# EAGLE board LedExtensionBoard_x12 (EAGLE 9.1.3), part 1 of 2
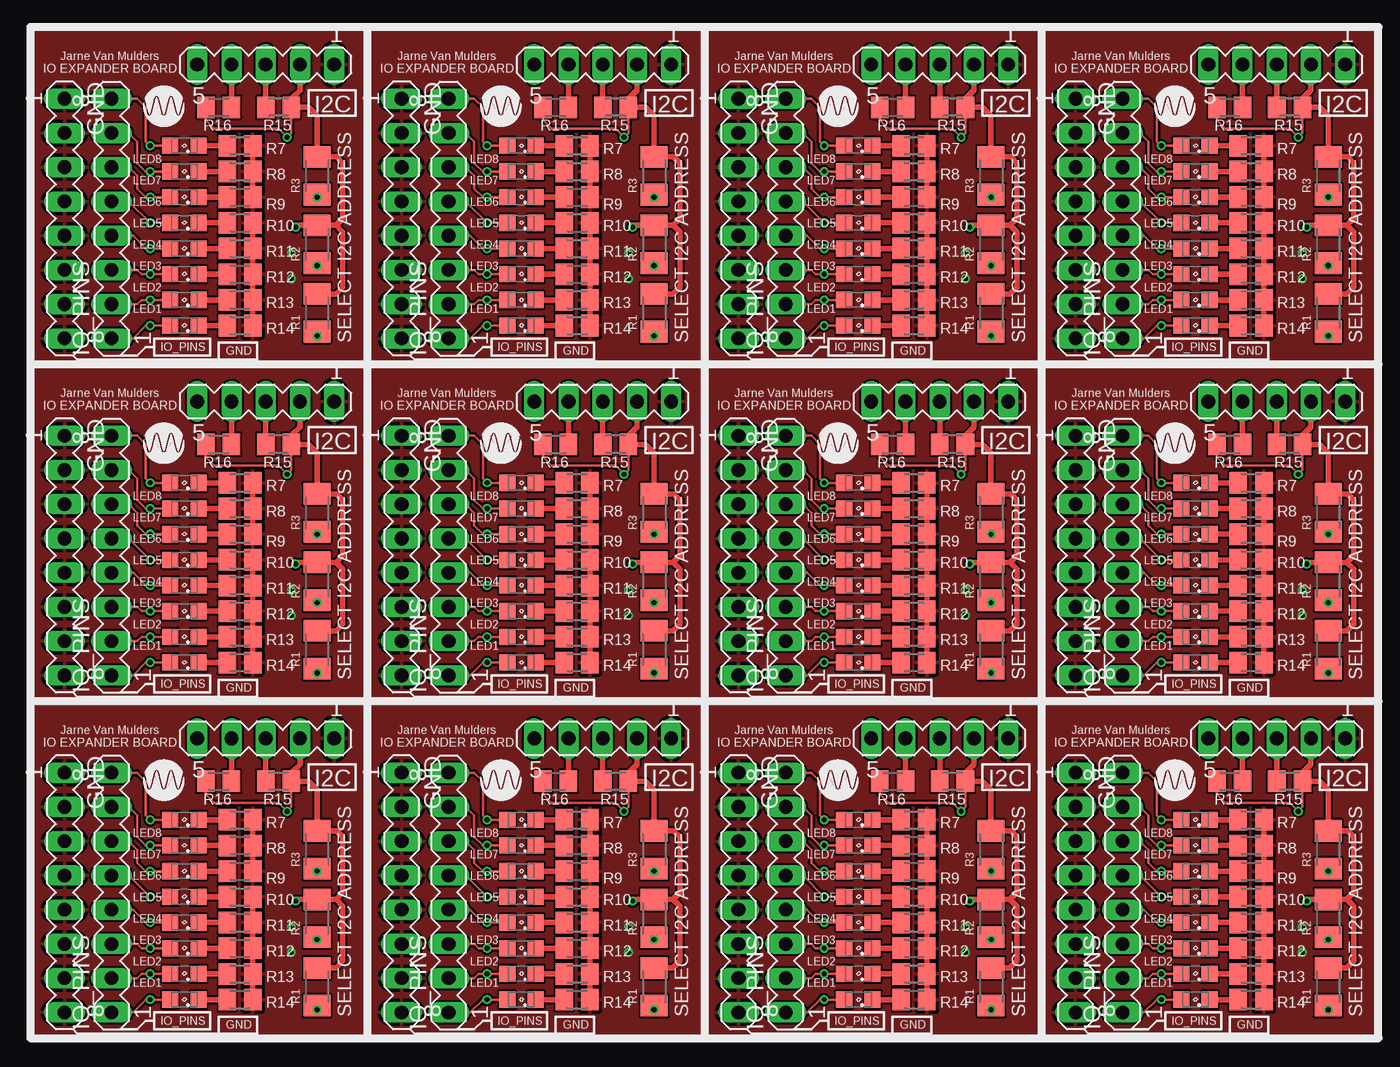
[diagram p0: board, top side]
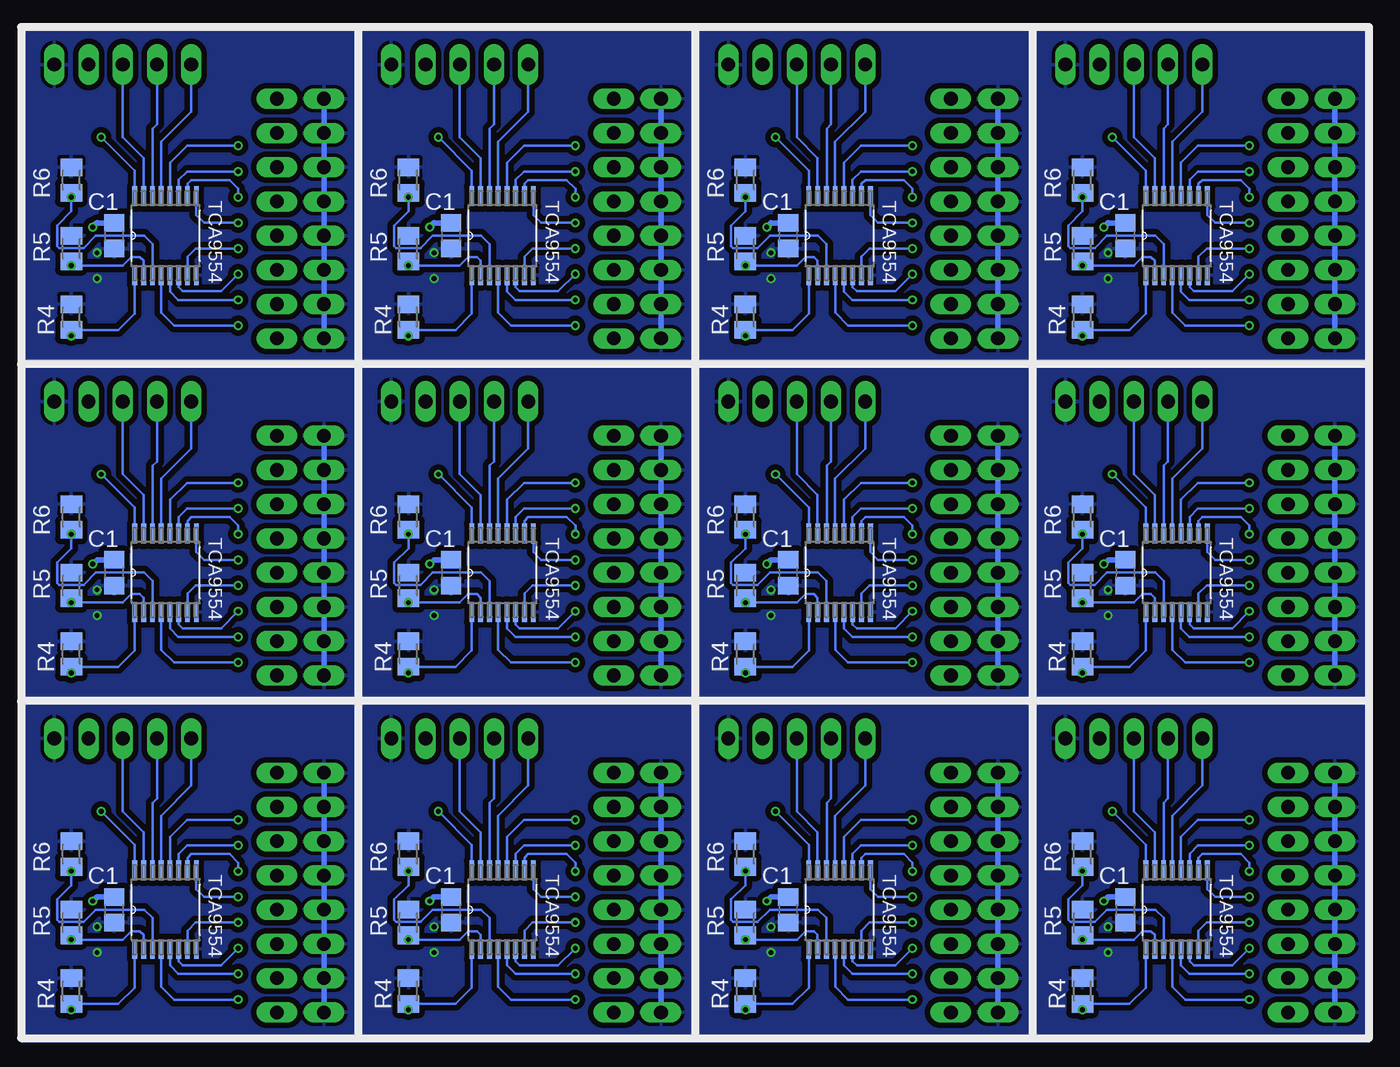
[diagram p1: board, bottom side, seen from below]

No outline drawn. Coordinates in mm, seen from the top.
Copper layers (1*16): Top 0.035mm / dielectric 1.5mm / Bottom 0.035mm
Design rules "SeeedStudio_2layer_DRU_no_angle_20140221-2": minimum track width 6mil, minimum drill 12mil, track to track 6mil, track to pad 6mil, pad to pad 6mil, via to via 6mil, smd to smd 0mil, copper to edge 10mil, drill to drill 10mil, minimum pad ring 10mil, minimum via ring 6mil, stop-mask expansion 2mil, vias tented up to drill 100mil, thermal gap 10mil

## Footprints (pad centres in the part's own frame; a part is rotated, then mirrored left to right if it is on the bottom)
C0805 = smd 1.3 x 1.5: 1 -0.95,0; 2 0.95,0
MA08-1 = drill 1.016 long: 1 -8.89,0; 2 -6.35,0; 3 -3.81,0; 4 -1.27,0; 5 1.27,0; 6 3.81,0; 7 6.35,0; 8 8.89,0
MA05-1 = drill 1.016 long: 1 -5.08,0; 2 -2.54,0; 3 0,0; 4 2.54,0; 5 5.08,0
SML0805 = smd 1.2 x 1.2: A 1.05,0; C -1.05,0
M1206 = smd 1.6 x 2: 1 -1.4,0; 2 1.4,0
M0805 = smd 1.3 x 1.6: 1 -0.95,0; 2 0.95,0
SOP65P640X120-16N = smd 1.473 x 0.356: 1 -2.921,2.286; 2 -2.921,1.626; 3 -2.921,0.965; 4 -2.921,0.33; 5 -2.921,-0.33; 6 -2.921,-0.965; 7 -2.921,-1.626; 8 -2.921,-2.286; 9 2.921,-2.286; 10 2.921,-1.626; 11 2.921,-0.965; 12 2.921,-0.33; 13 2.921,0.33; 14 2.921,0.965; 15 2.921,1.626; 16 2.921,2.286

## Placement (x,y rotation side)
C1  [C0805]  18.1,9.53 270 bottom
C2  [C0805]  43.1,9.53 270 bottom
C3  [C0805]  68.1,9.53 270 bottom
C4  [C0805]  93.1,9.53 270 bottom
C5  [C0805]  18.1,34.52 270 bottom
C6  [C0805]  43.1,34.52 270 bottom
C7  [C0805]  68.1,34.52 270 bottom
C8  [C0805]  93.1,34.52 270 bottom
C9  [C0805]  18.1,59.52 270 bottom
C10  [C0805]  43.1,59.52 270 bottom
C11  [C0805]  68.1,59.52 270 bottom
C12  [C0805]  93.1,59.52 270 bottom
GND  [MA08-1]  2.54,10.79 270 top
GND1  [MA08-1]  27.54,10.79 270 top
GND2  [MA08-1]  52.54,10.79 270 top
GND3  [MA08-1]  77.54,10.79 270 top
GND4  [MA08-1]  2.54,35.8 270 top
GND5  [MA08-1]  27.54,35.8 270 top
GND6  [MA08-1]  52.54,35.8 270 top
GND7  [MA08-1]  77.54,35.8 270 top
GND8  [MA08-1]  2.54,60.8 270 top
GND9  [MA08-1]  27.54,60.8 270 top
GND10  [MA08-1]  52.54,60.8 270 top
GND11  [MA08-1]  77.54,60.8 270 top
I2C  [MA05-1]  17.46,22.23 180 top
I2C1  [MA05-1]  42.46,22.23 180 top
I2C2  [MA05-1]  67.46,22.23 180 top
I2C3  [MA05-1]  92.46,22.23 180 top
I2C4  [MA05-1]  17.46,47.23 180 top
I2C5  [MA05-1]  42.46,47.23 180 top
I2C6  [MA05-1]  67.46,47.23 180 top
I2C7  [MA05-1]  92.46,47.23 180 top
I2C8  [MA05-1]  17.46,72.22 180 top
I2C9  [MA05-1]  42.46,72.22 180 top
I2C10  [MA05-1]  67.46,72.22 180 top
I2C11  [MA05-1]  92.46,72.22 180 top
IO_PINS  [MA08-1]  6.03,10.79 90 top
IO_PINS1  [MA08-1]  31.03,10.79 90 top
IO_PINS2  [MA08-1]  56.03,10.79 90 top
IO_PINS3  [MA08-1]  81.03,10.79 90 top
IO_PINS4  [MA08-1]  6.03,35.8 90 top
IO_PINS5  [MA08-1]  31.03,35.8 90 top
IO_PINS6  [MA08-1]  56.03,35.8 90 top
IO_PINS7  [MA08-1]  81.03,35.8 90 top
IO_PINS8  [MA08-1]  6.03,60.8 90 top
IO_PINS9  [MA08-1]  31.03,60.8 90 top
IO_PINS10  [MA08-1]  56.03,60.8 90 top
IO_PINS11  [MA08-1]  81.03,60.8 90 top
LED1  [SML0805]  11.43,2.86 180 top
LED2  [SML0805]  11.43,4.76 180 top
LED3  [SML0805]  11.43,6.67 180 top
LED4  [SML0805]  11.43,8.57 180 top
LED5  [SML0805]  11.43,10.48 180 top
LED6  [SML0805]  11.43,12.38 180 top
LED7  [SML0805]  11.43,14.29 180 top
LED8  [SML0805]  11.43,16.19 180 top
LED9  [SML0805]  36.43,2.86 180 top
LED10  [SML0805]  36.43,4.76 180 top
LED11  [SML0805]  36.43,6.67 180 top
LED12  [SML0805]  36.43,8.57 180 top
LED13  [SML0805]  36.43,10.48 180 top
LED14  [SML0805]  36.43,12.38 180 top
LED15  [SML0805]  36.43,14.29 180 top
LED16  [SML0805]  36.43,16.19 180 top
LED17  [SML0805]  61.43,2.86 180 top
LED18  [SML0805]  61.43,4.76 180 top
LED19  [SML0805]  61.43,6.67 180 top
LED20  [SML0805]  61.43,8.57 180 top
LED21  [SML0805]  61.43,10.48 180 top
LED22  [SML0805]  61.43,12.38 180 top
LED23  [SML0805]  61.43,14.29 180 top
LED24  [SML0805]  61.43,16.19 180 top
LED25  [SML0805]  86.43,2.86 180 top
LED26  [SML0805]  86.43,4.76 180 top
LED27  [SML0805]  86.43,6.67 180 top
LED28  [SML0805]  86.43,8.57 180 top
LED29  [SML0805]  86.43,10.48 180 top
LED30  [SML0805]  86.43,12.38 180 top
LED31  [SML0805]  86.43,14.29 180 top
LED32  [SML0805]  86.43,16.19 180 top
LED33  [SML0805]  11.43,27.86 180 top
LED34  [SML0805]  11.43,29.76 180 top
LED35  [SML0805]  11.43,31.67 180 top
LED36  [SML0805]  11.43,33.57 180 top
LED37  [SML0805]  11.43,35.48 180 top
LED38  [SML0805]  11.43,37.38 180 top
LED39  [SML0805]  11.43,39.29 180 top
LED40  [SML0805]  11.43,41.19 180 top
LED41  [SML0805]  36.43,27.86 180 top
LED42  [SML0805]  36.43,29.76 180 top
LED43  [SML0805]  36.43,31.67 180 top
LED44  [SML0805]  36.43,33.57 180 top
LED45  [SML0805]  36.43,35.48 180 top
LED46  [SML0805]  36.43,37.38 180 top
LED47  [SML0805]  36.43,39.29 180 top
LED48  [SML0805]  36.43,41.19 180 top
LED49  [SML0805]  61.43,27.86 180 top
LED50  [SML0805]  61.43,29.76 180 top
LED51  [SML0805]  61.43,31.67 180 top
LED52  [SML0805]  61.43,33.57 180 top
LED53  [SML0805]  61.43,35.48 180 top
LED54  [SML0805]  61.43,37.38 180 top
LED55  [SML0805]  61.43,39.29 180 top
LED56  [SML0805]  61.43,41.19 180 top
LED57  [SML0805]  86.43,27.86 180 top
LED58  [SML0805]  86.43,29.76 180 top
LED59  [SML0805]  86.43,31.67 180 top
LED60  [SML0805]  86.43,33.57 180 top
LED61  [SML0805]  86.43,35.48 180 top
LED62  [SML0805]  86.43,37.38 180 top
LED63  [SML0805]  86.43,39.29 180 top
LED64  [SML0805]  86.43,41.19 180 top
LED65  [SML0805]  11.43,52.86 180 top
LED66  [SML0805]  11.43,54.76 180 top
LED67  [SML0805]  11.43,56.67 180 top
LED68  [SML0805]  11.43,58.57 180 top
LED69  [SML0805]  11.43,60.48 180 top
LED70  [SML0805]  11.43,62.38 180 top
LED71  [SML0805]  11.43,64.29 180 top
LED72  [SML0805]  11.43,66.19 180 top
LED73  [SML0805]  36.43,52.86 180 top
LED74  [SML0805]  36.43,54.76 180 top
LED75  [SML0805]  36.43,56.67 180 top
LED76  [SML0805]  36.43,58.57 180 top
LED77  [SML0805]  36.43,60.48 180 top
LED78  [SML0805]  36.43,62.38 180 top
LED79  [SML0805]  36.43,64.29 180 top
LED80  [SML0805]  36.43,66.19 180 top
LED81  [SML0805]  61.43,52.86 180 top
LED82  [SML0805]  61.43,54.76 180 top
LED83  [SML0805]  61.43,56.67 180 top
LED84  [SML0805]  61.43,58.57 180 top
LED85  [SML0805]  61.43,60.48 180 top
LED86  [SML0805]  61.43,62.38 180 top
LED87  [SML0805]  61.43,64.29 180 top
LED88  [SML0805]  61.43,66.19 180 top
LED89  [SML0805]  86.43,52.86 180 top
LED90  [SML0805]  86.43,54.76 180 top
LED91  [SML0805]  86.43,56.67 180 top
LED92  [SML0805]  86.43,58.57 180 top
LED93  [SML0805]  86.43,60.48 180 top
LED94  [SML0805]  86.43,62.38 180 top
LED95  [SML0805]  86.43,64.29 180 top
LED96  [SML0805]  86.43,66.19 180 top
R1  0  [M1206]  21.27,3.81 90 top
R2  0  [M1206]  21.27,8.89 90 top
R3  0  [M1206]  21.27,13.97 90 top
R4  10k  [M0805]  21.27,3.49 270 bottom
R5  10k  [M0805]  21.27,8.57 270 bottom
R6  10k  [M0805]  21.27,13.65 270 bottom
R7  470  [M0805]  15.56,16.19 180 top
R8  470  [M0805]  15.56,14.29 180 top
R9  470  [M0805]  15.56,12.38 180 top
R10  10k  [M0805]  15.56,10.48 180 top
R11  470  [M0805]  15.56,8.57 180 top
R12  470  [M0805]  15.56,6.67 180 top
R13  470  [M0805]  15.56,4.76 180 top
R14  470  [M0805]  15.56,2.86 180 top
R15  10k  [M0805]  18.41,19.05 0 top
R16  10k  [M0805]  13.97,19.05 180 top
R17  0  [M1206]  46.27,3.81 90 top
R18  10k  [M0805]  40.56,10.48 180 top
R19  470  [M0805]  40.56,8.57 180 top
R20  470  [M0805]  40.56,6.67 180 top
R21  470  [M0805]  40.56,4.76 180 top
R22  470  [M0805]  40.56,2.86 180 top
R23  0  [M1206]  46.27,8.89 90 top
R24  0  [M1206]  46.27,13.97 90 top
R25  10k  [M0805]  46.27,3.49 270 bottom
R26  10k  [M0805]  46.27,8.57 270 bottom
R27  10k  [M0805]  46.27,13.65 270 bottom
R28  470  [M0805]  40.56,16.19 180 top
R29  470  [M0805]  40.56,14.29 180 top
R30  470  [M0805]  40.56,12.38 180 top
R31  10k  [M0805]  43.41,19.05 0 top
R32  10k  [M0805]  38.97,19.05 180 top
R33  0  [M1206]  71.27,3.81 90 top
R34  10k  [M0805]  65.56,10.48 180 top
R35  470  [M0805]  65.56,8.57 180 top
R36  470  [M0805]  65.56,6.67 180 top
R37  470  [M0805]  65.56,4.76 180 top
R38  470  [M0805]  65.56,2.86 180 top
R39  0  [M1206]  71.27,8.89 90 top
R40  0  [M1206]  71.27,13.97 90 top
R41  10k  [M0805]  71.27,3.49 270 bottom
R42  10k  [M0805]  71.27,8.57 270 bottom
R43  10k  [M0805]  71.27,13.65 270 bottom
R44  470  [M0805]  65.56,16.19 180 top
R45  470  [M0805]  65.56,14.29 180 top
R46  470  [M0805]  65.56,12.38 180 top
R47  10k  [M0805]  68.42,19.05 0 top
R48  10k  [M0805]  63.97,19.05 180 top
R49  0  [M1206]  96.27,3.81 90 top
R50  10k  [M0805]  90.56,10.48 180 top
R51  470  [M0805]  90.56,8.57 180 top
R52  470  [M0805]  90.56,6.67 180 top
R53  470  [M0805]  90.56,4.76 180 top
R54  470  [M0805]  90.56,2.86 180 top
R55  0  [M1206]  96.27,8.89 90 top
R56  0  [M1206]  96.27,13.97 90 top
R57  10k  [M0805]  96.27,3.49 270 bottom
R58  10k  [M0805]  96.27,8.57 270 bottom
R59  10k  [M0805]  96.27,13.65 270 bottom
R60  470  [M0805]  90.56,16.19 180 top
R61  470  [M0805]  90.56,14.29 180 top
R62  470  [M0805]  90.56,12.38 180 top
R63  10k  [M0805]  93.42,19.05 0 top
R64  10k  [M0805]  88.97,19.05 180 top
R65  0  [M1206]  21.27,28.81 90 top
R66  10k  [M0805]  15.56,35.48 180 top
R67  470  [M0805]  15.56,33.57 180 top
R68  470  [M0805]  15.56,31.67 180 top
R69  470  [M0805]  15.56,29.76 180 top
R70  470  [M0805]  15.56,27.86 180 top
R71  0  [M1206]  21.27,33.89 90 top
R72  0  [M1206]  21.27,38.97 90 top
R73  10k  [M0805]  21.27,28.49 270 bottom
R74  10k  [M0805]  21.27,33.57 270 bottom
R75  10k  [M0805]  21.27,38.65 270 bottom
R76  470  [M0805]  15.56,41.19 180 top
R77  470  [M0805]  15.56,39.29 180 top
R78  470  [M0805]  15.56,37.38 180 top
R79  10k  [M0805]  18.41,44.05 0 top
R80  10k  [M0805]  13.97,44.05 180 top
R81  0  [M1206]  46.27,28.81 90 top
R82  10k  [M0805]  40.56,35.48 180 top
R83  470  [M0805]  40.56,33.57 180 top
R84  470  [M0805]  40.56,31.67 180 top
R85  470  [M0805]  40.56,29.76 180 top
R86  470  [M0805]  40.56,27.86 180 top
R87  0  [M1206]  46.27,33.89 90 top
R88  0  [M1206]  46.27,38.97 90 top
R89  10k  [M0805]  46.27,28.49 270 bottom
R90  10k  [M0805]  46.27,33.57 270 bottom
R91  10k  [M0805]  46.27,38.65 270 bottom
R92  470  [M0805]  40.56,41.19 180 top
R93  470  [M0805]  40.56,39.29 180 top
R94  470  [M0805]  40.56,37.38 180 top
R95  10k  [M0805]  43.41,44.05 0 top
R96  10k  [M0805]  38.97,44.05 180 top
R97  0  [M1206]  71.27,28.81 90 top
R98  10k  [M0805]  65.56,35.48 180 top
R99  470  [M0805]  65.56,33.57 180 top
R100  470  [M0805]  65.56,31.67 180 top
R101  470  [M0805]  65.56,29.76 180 top
R102  470  [M0805]  65.56,27.86 180 top
R103  0  [M1206]  71.27,33.89 90 top
R104  0  [M1206]  71.27,38.97 90 top
R105  10k  [M0805]  71.27,28.49 270 bottom
R106  10k  [M0805]  71.27,33.57 270 bottom
R107  10k  [M0805]  71.27,38.65 270 bottom
R108  470  [M0805]  65.56,41.19 180 top
R109  470  [M0805]  65.56,39.29 180 top
R110  470  [M0805]  65.56,37.38 180 top
R111  10k  [M0805]  68.42,44.05 0 top
R112  10k  [M0805]  63.97,44.05 180 top
R113  0  [M1206]  96.27,28.81 90 top
R114  10k  [M0805]  90.56,35.48 180 top
R115  470  [M0805]  90.56,33.57 180 top
R116  470  [M0805]  90.56,31.67 180 top
R117  470  [M0805]  90.56,29.76 180 top
R118  470  [M0805]  90.56,27.86 180 top
R119  0  [M1206]  96.27,33.89 90 top
R120  0  [M1206]  96.27,38.97 90 top
R121  10k  [M0805]  96.27,28.49 270 bottom
R122  10k  [M0805]  96.27,33.57 270 bottom
R123  10k  [M0805]  96.27,38.65 270 bottom
R124  470  [M0805]  90.56,41.19 180 top
R125  470  [M0805]  90.56,39.29 180 top
R126  470  [M0805]  90.56,37.38 180 top
R127  10k  [M0805]  93.42,44.05 0 top
R128  10k  [M0805]  88.97,44.05 180 top
R129  0  [M1206]  21.27,53.81 90 top
R130  10k  [M0805]  15.56,60.48 180 top
R131  470  [M0805]  15.56,58.57 180 top
R132  470  [M0805]  15.56,56.67 180 top
R133  470  [M0805]  15.56,54.76 180 top
R134  470  [M0805]  15.56,52.86 180 top
R135  0  [M1206]  21.27,58.89 90 top
R136  0  [M1206]  21.27,63.97 90 top
R137  10k  [M0805]  21.27,53.49 270 bottom
R138  10k  [M0805]  21.27,58.57 270 bottom
R139  10k  [M0805]  21.27,63.65 270 bottom
R140  470  [M0805]  15.56,66.19 180 top
R141  470  [M0805]  15.56,64.29 180 top
R142  470  [M0805]  15.56,62.38 180 top
R143  10k  [M0805]  18.41,69.05 0 top
R144  10k  [M0805]  13.97,69.05 180 top
R145  0  [M1206]  46.27,53.81 90 top
R146  10k  [M0805]  40.56,60.48 180 top
R147  470  [M0805]  40.56,58.57 180 top
R148  470  [M0805]  40.56,56.67 180 top
R149  470  [M0805]  40.56,54.76 180 top
R150  470  [M0805]  40.56,52.86 180 top
R151  0  [M1206]  46.27,58.89 90 top
R152  0  [M1206]  46.27,63.97 90 top
R153  10k  [M0805]  46.27,53.49 270 bottom
R154  10k  [M0805]  46.27,58.57 270 bottom
R155  10k  [M0805]  46.27,63.65 270 bottom
R156  470  [M0805]  40.56,66.19 180 top
R157  470  [M0805]  40.56,64.29 180 top
R158  470  [M0805]  40.56,62.38 180 top
R159  10k  [M0805]  43.41,69.05 0 top
R160  10k  [M0805]  38.97,69.05 180 top
R161  0  [M1206]  71.27,53.81 90 top
R162  10k  [M0805]  65.56,60.48 180 top
R163  470  [M0805]  65.56,58.57 180 top
R164  470  [M0805]  65.56,56.67 180 top
R165  470  [M0805]  65.56,54.76 180 top
R166  470  [M0805]  65.56,52.86 180 top
R167  0  [M1206]  71.27,58.89 90 top
R168  0  [M1206]  71.27,63.97 90 top
R169  10k  [M0805]  71.27,53.49 270 bottom
R170  10k  [M0805]  71.27,58.57 270 bottom
R171  10k  [M0805]  71.27,63.65 270 bottom
R172  470  [M0805]  65.56,66.19 180 top
R173  470  [M0805]  65.56,64.29 180 top
R174  470  [M0805]  65.56,62.38 180 top
R175  10k  [M0805]  68.42,69.05 0 top
R176  10k  [M0805]  63.97,69.05 180 top
R177  0  [M1206]  96.27,53.81 90 top
R178  10k  [M0805]  90.56,60.48 180 top
R179  470  [M0805]  90.56,58.57 180 top
R180  470  [M0805]  90.56,56.67 180 top
R181  470  [M0805]  90.56,54.76 180 top
R182  470  [M0805]  90.56,52.86 180 top
R183  0  [M1206]  96.27,58.89 90 top
R184  0  [M1206]  96.27,63.97 90 top
R185  10k  [M0805]  96.27,53.49 270 bottom
R186  10k  [M0805]  96.27,58.57 270 bottom
R187  10k  [M0805]  96.27,63.65 270 bottom
R188  470  [M0805]  90.56,66.19 180 top
R189  470  [M0805]  90.56,64.29 180 top
R190  470  [M0805]  90.56,62.38 180 top
R191  10k  [M0805]  93.42,69.05 0 top
R192  10k  [M0805]  88.97,69.05 180 top
U1  TCA9554PWR  [SOP65P640X120-16N]  14.29,9.53 90 bottom
U2  TCA9554PWR  [SOP65P640X120-16N]  39.29,9.53 90 bottom
U3  TCA9554PWR  [SOP65P640X120-16N]  64.29,9.53 90 bottom
U4  TCA9554PWR  [SOP65P640X120-16N]  89.29,9.53 90 bottom
U5  TCA9554PWR  [SOP65P640X120-16N]  14.29,34.52 90 bottom
U6  TCA9554PWR  [SOP65P640X120-16N]  39.29,34.52 90 bottom
U7  TCA9554PWR  [SOP65P640X120-16N]  64.29,34.52 90 bottom
U8  TCA9554PWR  [SOP65P640X120-16N]  89.29,34.52 90 bottom
U9  TCA9554PWR  [SOP65P640X120-16N]  14.29,59.52 90 bottom
U10  TCA9554PWR  [SOP65P640X120-16N]  39.29,59.52 90 bottom
U11  TCA9554PWR  [SOP65P640X120-16N]  64.29,59.52 90 bottom
U12  TCA9554PWR  [SOP65P640X120-16N]  89.29,59.52 90 bottom

## Library data of the parts
C1-C12 R1-R192 = rcl
GND GND1-GND11 I2C I2C1-I2C11 IO_PINS IO_PINS1-IO_PINS11 = con-lstb; OC_FARNELL: unknown; OC_NEWARK: unknown
LED1-LED96 = led
U1-U12 = TCA9554PWR; AVAILABILITY: Unavailable; DESCRIPTION: Interface - I/O Expanders Remote 8-B I2C & SM Bus I/O Expander; MF: Texas Instruments; MP: TCA9554PWR; PACKAGE: TSSOP-16 Texas Instruments; PRICE: None

## Nets
+5V: C1.1 I2C.2 R1.2 R2.2 R3.2 R15.2 R16.2 U1.16
+5V1: C2.1 I2C1.2 R17.2 R23.2 R24.2 R31.2 R32.2 U2.16
+5V2: C3.1 I2C2.2 R33.2 R39.2 R40.2 R47.2 R48.2 U3.16
+5V3: C4.1 I2C3.2 R49.2 R55.2 R56.2 R63.2 R64.2 U4.16
+5V4: C5.1 I2C4.2 R65.2 R71.2 R72.2 R79.2 R80.2 U5.16
+5V5: C6.1 I2C5.2 R81.2 R87.2 R88.2 R95.2 R96.2 U6.16
+5V6: C7.1 I2C6.2 R97.2 R103.2 R104.2 R111.2 R112.2 U7.16
+5V7: C8.1 I2C7.2 R113.2 R119.2 R120.2 R127.2 R128.2 U8.16
+5V8: C9.1 I2C8.2 R129.2 R135.2 R136.2 R143.2 R144.2 U9.16
+5V9: C10.1 I2C9.2 R145.2 R151.2 R152.2 R159.2 R160.2 U10.16
+5V10: C11.1 I2C10.2 R161.2 R167.2 R168.2 R175.2 R176.2 U11.16
+5V11: C12.1 I2C11.2 R177.2 R183.2 R184.2 R191.2 R192.2 U12.16
GND: C1.2 GND.1 GND.2 GND.3 GND.4 GND.5 GND.6 GND.7 GND.8 I2C.1 R4.1 R5.1 R6.1 R7.1 R8.1 R9.1 R10.1 R11.1 R12.1 R13.1 R14.1 U1.8
GND1: C2.2 GND1.1 GND1.2 GND1.3 GND1.4 GND1.5 GND1.6 GND1.7 GND1.8 I2C1.1 R18.1 R19.1 R20.1 R21.1 R22.1 R25.1 R26.1 R27.1 R28.1 R29.1 R30.1 U2.8
GND2: C3.2 GND2.1 GND2.2 GND2.3 GND2.4 GND2.5 GND2.6 GND2.7 GND2.8 I2C2.1 R34.1 R35.1 R36.1 R37.1 R38.1 R41.1 R42.1 R43.1 R44.1 R45.1 R46.1 U3.8
GND3: C4.2 GND3.1 GND3.2 GND3.3 GND3.4 GND3.5 GND3.6 GND3.7 GND3.8 I2C3.1 R50.1 R51.1 R52.1 R53.1 R54.1 R57.1 R58.1 R59.1 R60.1 R61.1 R62.1 U4.8
GND4: C5.2 GND4.1 GND4.2 GND4.3 GND4.4 GND4.5 GND4.6 GND4.7 GND4.8 I2C4.1 R66.1 R67.1 R68.1 R69.1 R70.1 R73.1 R74.1 R75.1 R76.1 R77.1 R78.1 U5.8
GND5: C6.2 GND5.1 GND5.2 GND5.3 GND5.4 GND5.5 GND5.6 GND5.7 GND5.8 I2C5.1 R82.1 R83.1 R84.1 R85.1 R86.1 R89.1 R90.1 R91.1 R92.1 R93.1 R94.1 U6.8
GND6: C7.2 GND6.1 GND6.2 GND6.3 GND6.4 GND6.5 GND6.6 GND6.7 GND6.8 I2C6.1 R98.1 R99.1 R100.1 R101.1 R102.1 R105.1 R106.1 R107.1 R108.1 R109.1 R110.1 U7.8
GND7: C8.2 GND7.1 GND7.2 GND7.3 GND7.4 GND7.5 GND7.6 GND7.7 GND7.8 I2C7.1 R114.1 R115.1 R116.1 R117.1 R118.1 R121.1 R122.1 R123.1 R124.1 R125.1 R126.1 U8.8
GND8: C9.2 GND8.1 GND8.2 GND8.3 GND8.4 GND8.5 GND8.6 GND8.7 GND8.8 I2C8.1 R130.1 R131.1 R132.1 R133.1 R134.1 R137.1 R138.1 R139.1 R140.1 R141.1 R142.1 U9.8
GND9: C10.2 GND9.1 GND9.2 GND9.3 GND9.4 GND9.5 GND9.6 GND9.7 GND9.8 I2C9.1 R146.1 R147.1 R148.1 R149.1 R150.1 R153.1 R154.1 R155.1 R156.1 R157.1 R158.1 U10.8
GND10: C11.2 GND10.1 GND10.2 GND10.3 GND10.4 GND10.5 GND10.6 GND10.7 GND10.8 I2C10.1 R162.1 R163.1 R164.1 R165.1 R166.1 R169.1 R170.1 R171.1 R172.1 R173.1 R174.1 U11.8
GND11: C12.2 GND11.1 GND11.2 GND11.3 GND11.4 GND11.5 GND11.6 GND11.7 GND11.8 I2C11.1 R178.1 R179.1 R180.1 R181.1 R182.1 R185.1 R186.1 R187.1 R188.1 R189.1 R190.1 U12.8
INT: I2C.5 U1.13
INT1: I2C1.5 U2.13
INT2: I2C2.5 U3.13
INT3: I2C3.5 U4.13
INT4: I2C4.5 U5.13
INT5: I2C5.5 U6.13
INT6: I2C6.5 U7.13
INT7: I2C7.5 U8.13
INT8: I2C8.5 U9.13
INT9: I2C9.5 U10.13
INT10: I2C10.5 U11.13
INT11: I2C11.5 U12.13
N$1: IO_PINS.8 LED8.A U1.12
N$2: IO_PINS.7 LED7.A U1.11
N$3: IO_PINS.6 LED6.A U1.10
N$4: IO_PINS.5 LED5.A U1.9
N$5: IO_PINS.4 LED4.A U1.7
N$6: IO_PINS.3 LED3.A U1.6
N$7: IO_PINS.2 LED2.A U1.5
N$8: IO_PINS.1 LED1.A U1.4
N$9: LED8.C R7.2
N$10: LED7.C R8.2
N$11: LED6.C R9.2
N$12: R1.1 R4.2 U1.1
N$13: R2.1 R5.2 U1.2
N$14: R3.1 R6.2 U1.3
N$15: LED5.C R10.2
N$16: LED4.C R11.2
N$17: LED3.C R12.2
N$18: LED2.C R13.2
N$19: LED1.C R14.2
N$20: IO_PINS1.8 LED16.A U2.12
N$21: IO_PINS1.7 LED15.A U2.11
N$22: IO_PINS1.6 LED14.A U2.10
N$23: IO_PINS1.5 LED13.A U2.9
N$24: IO_PINS1.4 LED12.A U2.7
N$25: IO_PINS1.3 LED11.A U2.6
N$26: IO_PINS1.2 LED10.A U2.5
N$27: IO_PINS1.1 LED9.A U2.4
N$28: R17.1 R25.2 U2.1
N$29: R23.1 R26.2 U2.2
N$30: R24.1 R27.2 U2.3
N$31: LED16.C R28.2
N$32: LED15.C R29.2
N$33: LED14.C R30.2
N$34: LED13.C R18.2
N$35: LED12.C R19.2
N$36: LED11.C R20.2
N$37: LED10.C R21.2
N$38: LED9.C R22.2
N$39: IO_PINS2.8 LED24.A U3.12
N$40: IO_PINS2.7 LED23.A U3.11
N$41: IO_PINS2.6 LED22.A U3.10
N$42: IO_PINS2.5 LED21.A U3.9
N$43: IO_PINS2.4 LED20.A U3.7
N$44: IO_PINS2.3 LED19.A U3.6
N$45: IO_PINS2.2 LED18.A U3.5
N$46: IO_PINS2.1 LED17.A U3.4
N$47: R33.1 R41.2 U3.1
N$48: R39.1 R42.2 U3.2
N$49: R40.1 R43.2 U3.3
N$50: LED24.C R44.2
N$51: LED23.C R45.2
N$52: LED22.C R46.2
N$53: LED21.C R34.2
N$54: LED20.C R35.2
N$55: LED19.C R36.2
N$56: LED18.C R37.2
N$57: LED17.C R38.2
N$58: IO_PINS3.8 LED32.A U4.12
N$59: IO_PINS3.7 LED31.A U4.11
N$60: IO_PINS3.6 LED30.A U4.10
N$61: IO_PINS3.5 LED29.A U4.9
N$62: IO_PINS3.4 LED28.A U4.7
N$63: IO_PINS3.3 LED27.A U4.6
N$64: IO_PINS3.2 LED26.A U4.5
N$65: IO_PINS3.1 LED25.A U4.4
N$66: R49.1 R57.2 U4.1
N$67: R55.1 R58.2 U4.2
N$68: R56.1 R59.2 U4.3
N$69: LED32.C R60.2
N$70: LED31.C R61.2
N$71: LED30.C R62.2
N$72: LED29.C R50.2
N$73: LED28.C R51.2
N$74: LED27.C R52.2
N$75: LED26.C R53.2
N$76: LED25.C R54.2
N$77: IO_PINS4.8 LED40.A U5.12
N$78: IO_PINS4.7 LED39.A U5.11
N$79: IO_PINS4.6 LED38.A U5.10
N$80: IO_PINS4.5 LED37.A U5.9
N$81: IO_PINS4.4 LED36.A U5.7
N$82: IO_PINS4.3 LED35.A U5.6
N$83: IO_PINS4.2 LED34.A U5.5
N$84: IO_PINS4.1 LED33.A U5.4
N$85: R65.1 R73.2 U5.1
N$86: R71.1 R74.2 U5.2
N$87: R72.1 R75.2 U5.3
N$88: LED40.C R76.2
N$89: LED39.C R77.2
N$90: LED38.C R78.2
N$91: LED37.C R66.2
N$92: LED36.C R67.2
N$93: LED35.C R68.2
N$94: LED34.C R69.2
N$95: LED33.C R70.2
N$96: IO_PINS5.8 LED48.A U6.12
N$97: IO_PINS5.7 LED47.A U6.11
N$98: IO_PINS5.6 LED46.A U6.10
N$99: IO_PINS5.5 LED45.A U6.9
N$100: IO_PINS5.4 LED44.A U6.7
N$101: IO_PINS5.3 LED43.A U6.6
N$102: IO_PINS5.2 LED42.A U6.5
N$103: IO_PINS5.1 LED41.A U6.4
N$104: R81.1 R89.2 U6.1
N$105: R87.1 R90.2 U6.2
N$106: R88.1 R91.2 U6.3
N$107: LED48.C R92.2
N$108: LED47.C R93.2
N$109: LED46.C R94.2
N$110: LED45.C R82.2
N$111: LED44.C R83.2
N$112: LED43.C R84.2
N$113: LED42.C R85.2
N$114: LED41.C R86.2
N$115: IO_PINS6.8 LED56.A U7.12
N$116: IO_PINS6.7 LED55.A U7.11
N$117: IO_PINS6.6 LED54.A U7.10
N$118: IO_PINS6.5 LED53.A U7.9
N$119: IO_PINS6.4 LED52.A U7.7
N$120: IO_PINS6.3 LED51.A U7.6
N$121: IO_PINS6.2 LED50.A U7.5
N$122: IO_PINS6.1 LED49.A U7.4
N$123: R97.1 R105.2 U7.1
N$124: R103.1 R106.2 U7.2
N$125: R104.1 R107.2 U7.3
N$126: LED56.C R108.2
N$127: LED55.C R109.2
N$128: LED54.C R110.2
N$129: LED53.C R98.2
N$130: LED52.C R99.2
N$131: LED51.C R100.2
N$132: LED50.C R101.2
N$133: LED49.C R102.2
N$134: IO_PINS7.8 LED64.A U8.12
N$135: IO_PINS7.7 LED63.A U8.11
N$136: IO_PINS7.6 LED62.A U8.10
N$137: IO_PINS7.5 LED61.A U8.9
N$138: IO_PINS7.4 LED60.A U8.7
N$139: IO_PINS7.3 LED59.A U8.6
N$140: IO_PINS7.2 LED58.A U8.5
N$141: IO_PINS7.1 LED57.A U8.4
N$142: R113.1 R121.2 U8.1
N$143: R119.1 R122.2 U8.2
N$144: R120.1 R123.2 U8.3
N$145: LED64.C R124.2
N$146: LED63.C R125.2
N$147: LED62.C R126.2
N$148: LED61.C R114.2
N$149: LED60.C R115.2
N$150: LED59.C R116.2
N$151: LED58.C R117.2
N$152: LED57.C R118.2
N$153: IO_PINS8.8 LED72.A U9.12
N$154: IO_PINS8.7 LED71.A U9.11
N$155: IO_PINS8.6 LED70.A U9.10
N$156: IO_PINS8.5 LED69.A U9.9
N$157: IO_PINS8.4 LED68.A U9.7
N$158: IO_PINS8.3 LED67.A U9.6
N$159: IO_PINS8.2 LED66.A U9.5
N$160: IO_PINS8.1 LED65.A U9.4
N$161: R129.1 R137.2 U9.1
N$162: R135.1 R138.2 U9.2
N$163: R136.1 R139.2 U9.3
N$164: LED72.C R140.2
N$165: LED71.C R141.2
N$166: LED70.C R142.2
N$167: LED69.C R130.2
N$168: LED68.C R131.2
N$169: LED67.C R132.2
N$170: LED66.C R133.2
N$171: LED65.C R134.2
N$172: IO_PINS9.8 LED80.A U10.12
N$173: IO_PINS9.7 LED79.A U10.11
N$174: IO_PINS9.6 LED78.A U10.10
N$175: IO_PINS9.5 LED77.A U10.9
N$176: IO_PINS9.4 LED76.A U10.7
N$177: IO_PINS9.3 LED75.A U10.6
N$178: IO_PINS9.2 LED74.A U10.5
N$179: IO_PINS9.1 LED73.A U10.4
N$180: R145.1 R153.2 U10.1
N$181: R151.1 R154.2 U10.2
N$182: R152.1 R155.2 U10.3
N$183: LED80.C R156.2
N$184: LED79.C R157.2
N$185: LED78.C R158.2
N$186: LED77.C R146.2
N$187: LED76.C R147.2
N$188: LED75.C R148.2
N$189: LED74.C R149.2
N$190: LED73.C R150.2
N$191: IO_PINS10.8 LED88.A U11.12
N$192: IO_PINS10.7 LED87.A U11.11
N$193: IO_PINS10.6 LED86.A U11.10
N$194: IO_PINS10.5 LED85.A U11.9
N$195: IO_PINS10.4 LED84.A U11.7
N$196: IO_PINS10.3 LED83.A U11.6
N$197: IO_PINS10.2 LED82.A U11.5
N$198: IO_PINS10.1 LED81.A U11.4
N$199: R161.1 R169.2 U11.1
N$200: R167.1 R170.2 U11.2
N$201: R168.1 R171.2 U11.3
N$202: LED88.C R172.2
N$203: LED87.C R173.2
N$204: LED86.C R174.2
N$205: LED85.C R162.2
N$206: LED84.C R163.2
N$207: LED83.C R164.2
N$208: LED82.C R165.2
N$209: LED81.C R166.2
N$210: IO_PINS11.8 LED96.A U12.12
N$211: IO_PINS11.7 LED95.A U12.11
N$212: IO_PINS11.6 LED94.A U12.10
N$213: IO_PINS11.5 LED93.A U12.9
N$214: IO_PINS11.4 LED92.A U12.7
N$215: IO_PINS11.3 LED91.A U12.6
N$216: IO_PINS11.2 LED90.A U12.5
N$217: IO_PINS11.1 LED89.A U12.4
N$218: R177.1 R185.2 U12.1
N$219: R183.1 R186.2 U12.2
N$220: R184.1 R187.2 U12.3
N$221: LED96.C R188.2
N$222: LED95.C R189.2
N$223: LED94.C R190.2
N$224: LED93.C R178.2
N$225: LED92.C R179.2
N$226: LED91.C R180.2
N$227: LED90.C R181.2
N$228: LED89.C R182.2
SCL: I2C.4 R16.1 U1.14
SCL1: I2C1.4 R32.1 U2.14
SCL2: I2C2.4 R48.1 U3.14
SCL3: I2C3.4 R64.1 U4.14
SCL4: I2C4.4 R80.1 U5.14
SCL5: I2C5.4 R96.1 U6.14
SCL6: I2C6.4 R112.1 U7.14
SCL7: I2C7.4 R128.1 U8.14
SCL8: I2C8.4 R144.1 U9.14
SCL9: I2C9.4 R160.1 U10.14
SCL10: I2C10.4 R176.1 U11.14
SCL11: I2C11.4 R192.1 U12.14
SDA: I2C.3 R15.1 U1.15
SDA1: I2C1.3 R31.1 U2.15
SDA2: I2C2.3 R47.1 U3.15
SDA3: I2C3.3 R63.1 U4.15
SDA4: I2C4.3 R79.1 U5.15
SDA5: I2C5.3 R95.1 U6.15
SDA6: I2C6.3 R111.1 U7.15
SDA7: I2C7.3 R127.1 U8.15
SDA8: I2C8.3 R143.1 U9.15
SDA9: I2C9.3 R159.1 U10.15
SDA10: I2C10.3 R175.1 U11.15
SDA11: I2C11.3 R191.1 U12.15